# EAGLE board wheel_board_rear (EAGLE 9.5.0)
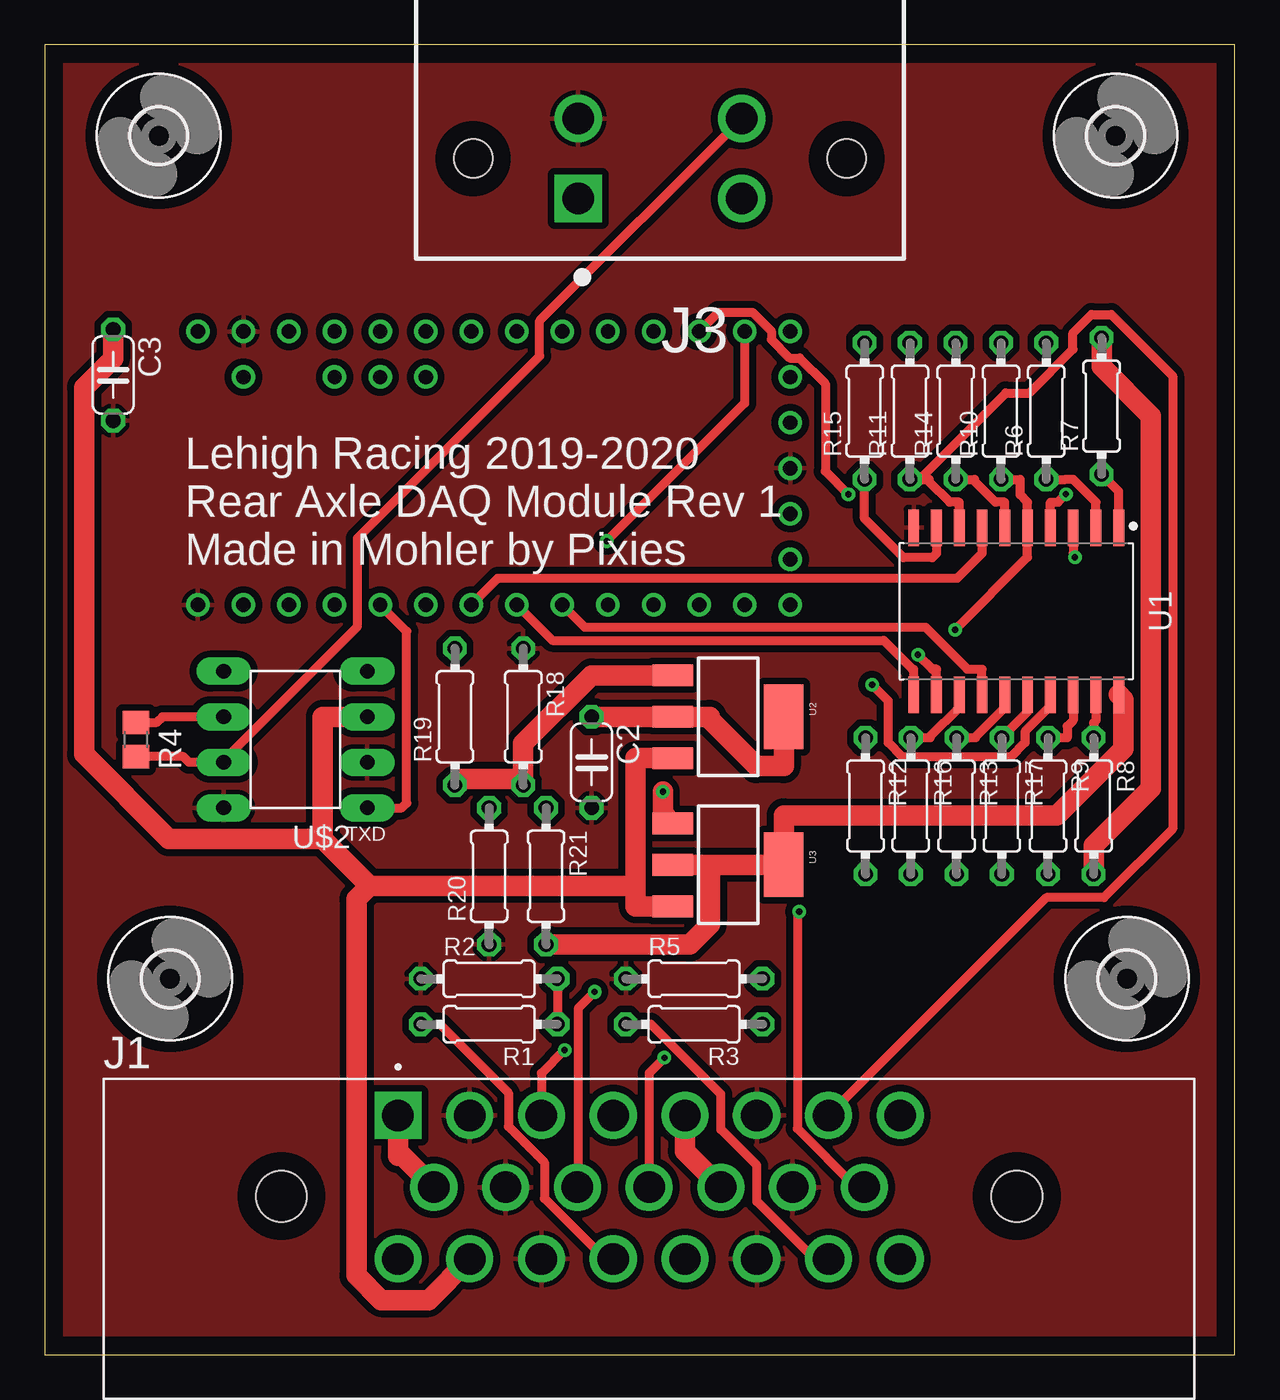
[diagram p0: board, top side]
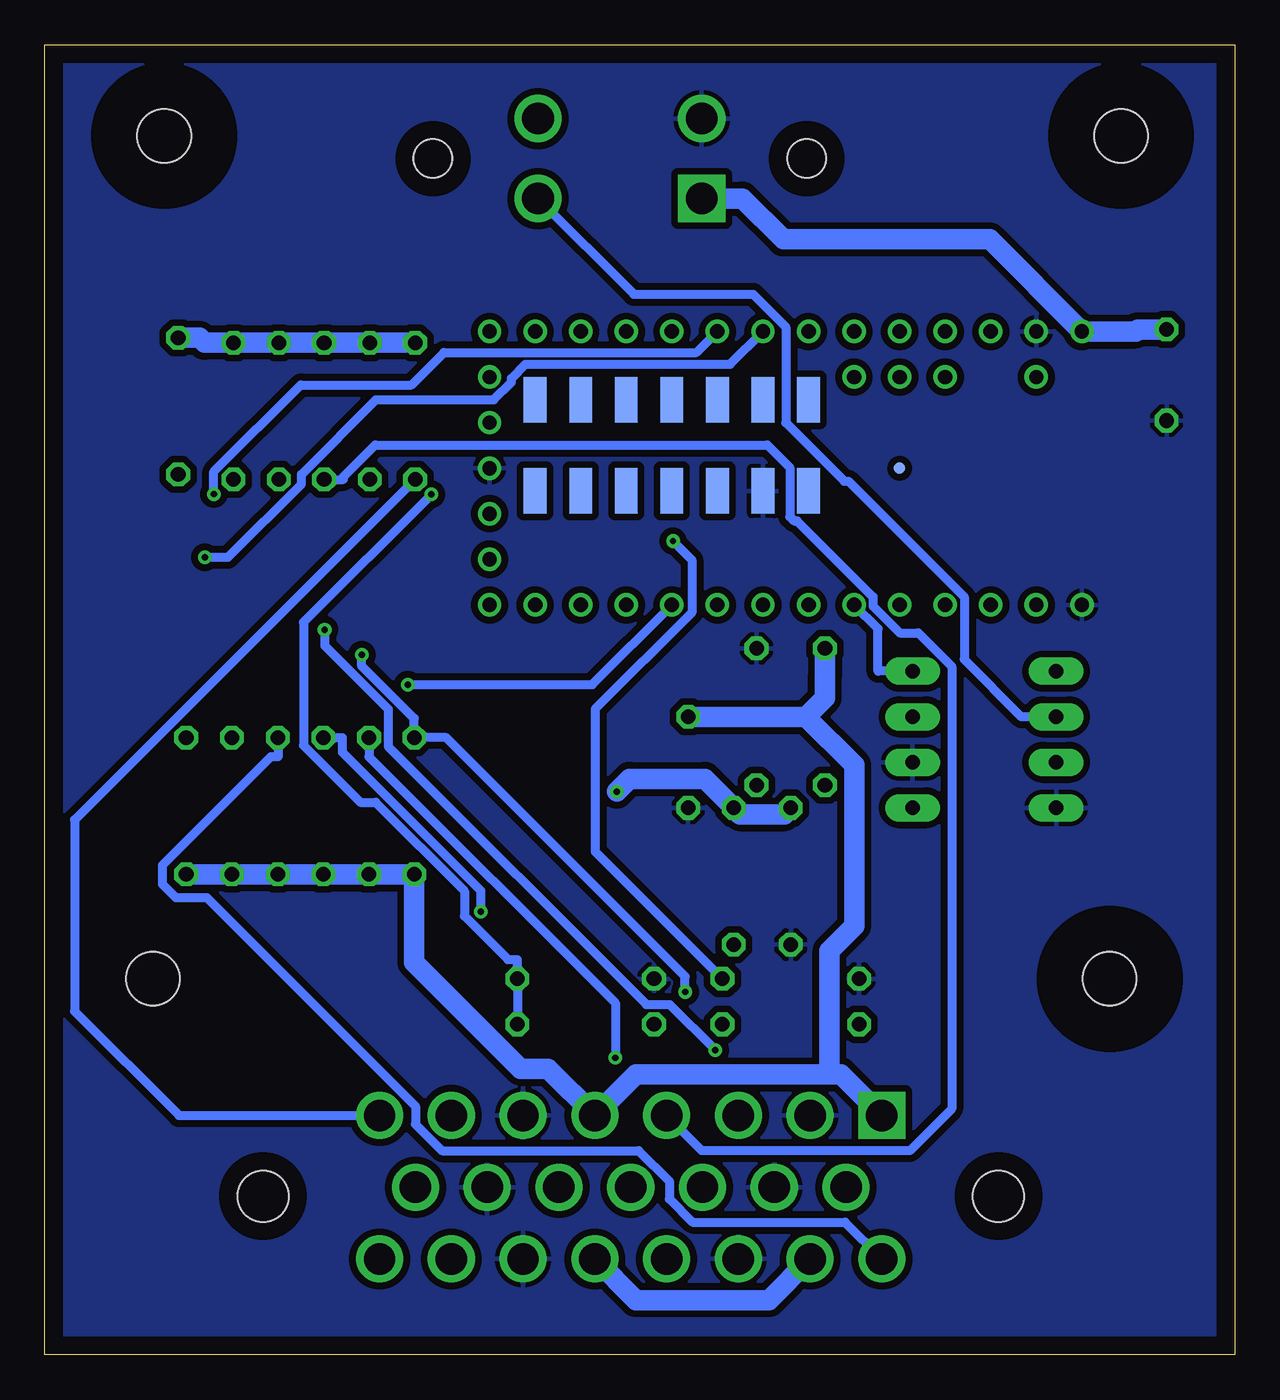
[diagram p1: board, bottom side, seen from below]

Size 66.34 x 73.02 mm. Coordinates in mm from the lower left corner, seen from the top.
Outline: 0,0 66.35,0 66.35,73.01 0,73.01 0,0
Copper layers (1*16): Top 0.035mm / dielectric 1.5mm / Bottom 0.035mm
Design rules "default": minimum track width 6mil, minimum drill 0.35mm, track to track 6mil, track to pad 6mil, pad to pad 6mil, via to via 6mil, smd to smd 6mil, copper to edge 40mil, drill to drill 6mil, minimum pad ring 10mil, minimum via ring 8mil, stop-mask expansion 4mil, vias tented up to drill 0mil, thermal gap 10mil
Net classes: 0 default: width 0.508 mm, drill 0.254 mm; 1 pwr: width 1.143 mm, clearance 0.381 mm

## Footprints (pad centres in the part's own frame; a part is rotated, then mirrored left to right if it is on the bottom)
C050-024X044 = drill 0.813 octagon: 1 -2.54,0; 2 2.54,0
3,0 = hole 3: 0,0
TE_1-776087-1 = drill 1.75 square: 1 0,0 | drill 1.75: 2 4,0; 3 8,0; 4 12,0; 5 16,0; 6 20,0; 7 24,0; 8 28,0; 9 2,-4; 10 6,-4; 11 10,-4; 12 14,-4; 13 18,-4; 14 22,-4; 15 26,-4; 16 0,-8; 17 4,-8; 18 8,-8; 19 12,-8; 20 16,-8; 21 20,-8; 22 24,-8; 23 28,-8 | hole 2.85: -6.5,-4.5; 34.5,-4.5
TE_DTF13-4P = drill 1.76 square: 1 4.561,2.223 | drill 1.76: 2 4.561,-2.227; 3 -4.559,-2.227; 4 -4.559,2.223 | hole 2.16: -10.415,0; 10.415,0
0204/7 = drill 0.813 octagon: 1 -3.81,0; 2 3.81,0
R0805 = smd 1.3 x 1.5: 1 -0.95,0; 2 0.95,0
SOIC127P1032X265-20N = smd 2.052 x 0.602: 1 -4.654,5.715; 2 -4.654,4.445; 3 -4.654,3.175; 4 -4.654,1.905; 5 -4.654,0.635; 6 -4.654,-0.635; 7 -4.654,-1.905; 8 -4.654,-3.175; 9 -4.654,-4.445; 10 -4.654,-5.715; 11 4.654,-5.715; 12 4.654,-4.445; 13 4.654,-3.175; 14 4.654,-1.905; 15 4.654,-0.635; 16 4.654,0.635; 17 4.654,1.905; 18 4.654,3.175; 19 4.654,4.445; 20 4.654,5.715
SOT223 = smd 1.219 x 2.235: 1 -2.311,-3.099; 2 0,-3.099; 3 2.311,-3.099 | smd 3.6 x 2.2: 4 0,3.099
TEENSY3.1_ALL = drill 0.8: 3.3V@1 2.54,5.08; 3.3V@2 -7.62,-22.86; A10 0,0; A11 0,-2.54; A14/DAC 0,-22.86; AGND 2.54,7.62; AREF 0,2.54; D0 -12.7,7.62; D1 -12.7,5.08; D2 -12.7,2.54; D3 -12.7,0; D4 -12.7,-2.54; D5 -12.7,-5.08; D6 -12.7,-7.62; D7 -12.7,-10.16; D8 -12.7,-12.7; D9 -12.7,-15.24; D10 -12.7,-17.78; D11 -12.7,-20.32; D12 -12.7,-22.86; D13/LED 2.54,-22.86; D14/A0 2.54,-20.32; D15/A1 2.54,-17.78; D16/A2 2.54,-15.24; D17/A3 2.54,-12.7; D18/A4 2.54,-10.16; D19/A5 2.54,-7.62; D20/A6 2.54,-5.08; D21/A7 2.54,-2.54; D22/A8 2.54,0; D23/A9 2.54,2.54; GND@1 -12.7,10.16; GND@2 -5.08,-22.86; PROGRAM -2.54,-22.86; VBAT -10.16,-22.86; VIN 2.54,10.16; VUSB 0,7.62 | smd 2.54 x 1.27 bottom: 3.3V@3 -1.27,-7.62; A12 -6.35,-5.08; A13 -1.27,-5.08; D24 -6.35,-10.16; D25 -6.35,-12.7; D26/A15 -6.35,-15.24; D27/A16 -6.35,-17.78; D28/A17 -6.35,-20.32; D29/A18 -1.27,-20.32; D30/A19 -1.27,-17.78; D31/A20 -1.27,-15.24; D32 -1.27,-12.7; D33 -1.27,-10.16; GND@3 -6.35,-7.62 | smd 0.635 x 0.635 bottom: RESET -5.08,0
MCP2561_PDIP = drill 0.813 pad 1.524 long: CANH 4,1.27; CANL 4,-1.27; RXD -4,-3.81; SPLIT 4,-3.81; STBY 4,3.81; TXD -4,3.81; VDD -4,-1.27; VSS -4,1.27

## Placement (x,y rotation side)
C2  10u  [C050-024X044]  30.48,33.02 270 top
C3  [C050-024X044]  3.81,54.61 270 top
H1  MOUNT-HOLE3.0  [3,0]  60.33,20.95 0 top
H2  MOUNT-HOLE3.0  [3,0]  6.99,20.95 0 top
H3  MOUNT-HOLE3.0  [3,0]  59.69,67.94 0 top
H4  MOUNT-HOLE3.0  [3,0]  6.35,67.94 0 top
J1  1-776087-1  [TE_1-776087-1]  19.69,13.33 0 top
J3  DTF13-4P  [TE_DTF13-4P]  34.29,66.67 180 top
R1  100k  [0204/7]  24.77,18.41 180 top
R2  180k  [0204/7]  24.77,20.95 0 top
R3  100k  [0204/7]  36.2,18.41 180 top
R4  120  [R0805]  5.08,34.29 270 top
R5  180k  [0204/7]  36.2,20.95 0 top
R6  4.7k  [0204/7]  55.83,52.6 90 top
R7  4.7k  [0204/7]  58.91,52.88 90 top
R8  4.7k  [0204/7]  58.47,30.59 270 top
R9  4.7k  [0204/7]  55.92,30.59 270 top
R10  4.7k  [0204/7]  53.3,52.6 90 top
R11  4.7k  [0204/7]  48.23,52.6 90 top
R12  4.7k  [0204/7]  45.75,30.59 270 top
R13  4.7k  [0204/7]  50.83,30.59 270 top
R14  4.7k  [0204/7]  50.78,52.6 90 top
R15  4.7k  [0204/7]  45.7,52.6 90 top
R16  4.7k  [0204/7]  48.27,30.59 270 top
R17  4.7k  [0204/7]  53.35,30.59 270 top
R18  12k  [0204/7]  26.67,35.56 270 top
R19  10k  [0204/7]  22.86,35.56 90 top
R20  20k  [0204/7]  24.77,26.67 90 top
R21  12k  [0204/7]  27.94,26.67 270 top
U1  PCA9518PWRSOIC-20  [SOIC127P1032X265-20N]  54.15,41.44 270 top
U2  LM1117  [SOT223]  38.1,35.56 270 top
U3  LM1117  [SOT223]  38.1,27.3 270 top
U$1  TEENSY3.1_ALL  [TEENSY3.1_ALL]  18.69,54.5 90 top
U$2  MCP2561MCP  [MCP2561_PDIP]  13.97,34.29 180 top

## Library data of the parts
C2 C3 = rcl; SPICEPREFIX: C
H1-H4 = holes
J1 = 1-776087-1; AVAILABILITY: Unavailable; COMMENT: 1-776087-1; DESCRIPTION: AMPSEAL Series; 4mm Pitch 23 Way 3 Row Right Angle PCB Header; Solder Term; 8A; EU_ROHS_COMPLIANCE: Compliant; MF: TE Connectivity; MP: 1-776087-1; PACKAGE: None; PRICE: None; TE_PURCHASE_URL: https://www.te.com/usa-en/product-1-776087-1.html?te_bu=Cor&te_type=disp&te_campaign=seda_glo_cor-seda-global-disp-prtnr-fy19-seda-model-bom-cta_sma-317_1&elqCampaignId=32493
J3 = DTF13-4P; AVAILABILITY: In stock; MF: TE Connectivity; MPN: DTF13-4P; PARTREV: NC; STANDARD: Manufacturer recommendation
R1-R3 R5-R21 = rcl; SPICEPREFIX: R
R4 = eagle-ltspice; SPICEMODEL: NONE; SPICEPREFIX: R
U1 = PCA9518PWR
U2 U3 = SparkFun-IC-Power; PROD_ID: VREG-08170
U$1 = Teensy3.1
U$2 = PoJD

## Nets
2.6V [pwr]: C2.1 J1.1 J1.5 J1.9 J1.13 R6.2 R7.2 R8.2 R9.2 R10.2 R11.2 R12.2 R13.2 R14.2 R15.2 R16.2 R17.2 R19.2 U2.2 U2.4
3.3V [pwr]: R21.2 U1.20 U3.2 U3.4
A0: R1.1 R2.2 U$1.D14/A0
A1: R3.1 R5.2 U$1.D15/A1
CAN-RX: U$1.D4 U$2.RXD
CAN-TX: U$1.D3 U$2.TXD
CAN_H: J3.3 R4.2 U$2.CANH
CAN_L: J3.4 R4.1 U$2.CANL
EN1: U1.7 U$1.D5
EN2: U1.11 U$1.D6
EN3: U1.14 U$1.D7
EN4: U1.17 U$1.D8
EXT_SCL1: J1.3 R10.1 U1.5
EXT_SCL2: J1.7 R11.1 U1.8
EXT_SCL3: J1.11 R12.1 U1.12
EXT_SCL4: J1.15 R13.1 U1.15
EXT_SDA1: J1.4 R14.1 U1.6
EXT_SDA2: J1.8 R15.1 U1.9
EXT_SDA3: J1.12 R16.1 U1.13
EXT_SDA4: J1.16 R17.1 U1.16
GND [pwr]: C2.2 C3.2 J1.2 J1.6 J1.10 J1.14 J1.18 J1.21 J3.2 R2.1 R5.1 R18.1 R20.1 U1.10 U$1.AGND U$1.GND@1 U$1.GND@2 U$1.GND@3 U$2.STBY U$2.VSS
N$1: R9.1 U1.18
N$2: R8.1 U1.19
N$3: R7.1 U1.1
N$4: R6.1 U1.2
N$5 [pwr]: R20.2 R21.1 U3.1
N$6: J1.19 R1.2
N$7: J1.22 R3.2
N$14 [pwr]: R18.2 R19.1 U2.1
SCL0: U1.3 U$1.D19/A5
SCL1: U$1.D16/A2
SDA0: U1.4 U$1.D18/A4
SDA1: U$1.D17/A3
VDD_3V3: U$2.SPLIT
VIN [pwr]: C3.1 J1.17 J1.20 J3.1 U2.3 U3.3 U$1.VIN U$2.VDD

## Tracks (layer width: path | path; a pad name or v marks a point on that pad's centre or on a via)
2.6V
  Top 1.143: U2.4 41.2,32.81 39.66,32.81 37.07,35.4 37.07,35.56 U2.2 C2.1 | J1.5 35.69,11.33 J1.13 | J1.1 19.69,11.07 19.95,11.07 J1.9 | R8.2 58.47,28.39 61.65,31.58 61.65,52.33 58.91,55.07 R7.2
  Bottom 1.143: 23.92,35.56 22.86,36.62 22.86,37.76 R19.2 | C2.1 23.92,35.56 | 22.6,15.63 22.6,22.52 21.22,23.9 21.22,32.86 23.92,35.56 | 22.6,15.63 21.98,15.63 J1.1 | 22.6,15.63 33.39,15.63 J1.5 38.29,15.94 39.81,15.94 45.75,21.88 R12.2 46.66,26.78 R16.2 R13.2 R17.2 R9.2 R8.2 | R7.2 57.72,56.69 57.44,56.41 R6.2 R10.2 R14.2 R11.2 R15.2
3.3V
  Top 1.143: U1.20 60.13,36.52 60.13,33.77 56.42,30.06 41.2,30.06 U3.4 37.07,27.3 | 37.07,27.3 37.07,23.97 35.96,22.86 R21.2 | 37.07,27.3 36.69,27.3 U3.2
A0  (via drill 0.35 pad 0.76)
  Top 0.508: U$1.D14/A0 39.01,53.04 v31.32,45.35 | R2.2 R1.1
  Bottom 0.508: v31.32,45.35 30.27,44.3 30.27,41.37 35.66,35.98 35.66,28.04 R2.2
A1  (via drill 0.35 pad 0.76)
  Top 0.508: U$1.D15/A1 37.55,58.11 39.44,58.11 40.49,57.06 40.49,56.59 41.52,55.56 42.07,55.56 43.51,54.12 43.51,49.25 v44.8,47.95
  Bottom 0.508: v44.8,47.95 51.92,40.83 51.92,33.97 48.75,30.79 47.91,30.79 42.96,25.85 42.96,24.45 40.53,22.02 40.01,22.02 R5.2 R3.1
CAN-RX
  Bottom 0.508: U$1.D4 19.9,40.46 19.9,38.1 U$2.RXD
CAN-TX
  Top 0.508: U$2.TXD 19.9,30.48 20.17,30.75 20.17,40.32 U$1.D3
CAN_H
  Top 0.508: 9.67,33.02 9.84,33.02 17.42,40.6 17.42,45.51 27.58,55.67 27.58,57.64 J3.3 | U$2.CANH 9.67,33.02 | 9.67,33.02 8.04,33.02 7.72,33.34 R4.2 | 9.67,33.02
CAN_L
  Top 0.508: R4.1 6.24,35.24 6.56,35.56 U$2.CANL
  Bottom 0.508: U$2.CANL 11.9,35.56 15.09,38.75 15.09,42.24 21.55,48.69 21.78,48.69 25.04,51.95 25.04,57.29 26.87,59.12 33.51,59.12 J3.4
EN1
  Top 0.508: U$1.D5 25.24,43.27 50.85,43.27 52.24,44.66 U1.7
EN2
  Top 0.508: U$1.D6 28.3,39.81 46.76,39.81 48.36,38.22 48.44,38.22 U1.11
EN3
  Top 0.508: U$1.D7 30.09,40.56 49.09,40.56 51.43,38.22 52.24,38.22 U1.14
EN4  (via drill 0.35 pad 0.76)
  Top 0.508: U1.17 56.05,36.15 54.64,34.74 54.64,34.12 53.84,33.32 47.81,33.32 47.01,34.12 47.01,36.45 v46.11,37.35
  Bottom 0.508: v46.11,37.35 35.84,37.35 U$1.D8
EXT_SCL1  (via drill 0.35 pad 0.76)
  Top 0.508: R10.1 54.37,48.79 54.37,47.94 54.78,47.53 U1.5 54.78,44.45 v50.75,40.42 | v28.97,16.98 27.69,15.69 J1.3
  Bottom 0.508: v50.75,40.42 50.75,39.53 47.21,35.99 47.21,33.91 32.82,19.52 31.52,19.52 v28.97,16.98
EXT_SCL2
  Top 0.508: 48.76,48.79 53.57,53.6 54.87,53.6 57.31,56.04 57.31,56.96 58.34,57.99 59.44,57.99 62.88,54.55 62.88,29.31 59.04,25.48 55.83,25.48 J1.7 | 48.76,48.79 49.29,48.79 49.29,48.68 50.44,47.53 50.98,47.53 U1.8 | R11.1 48.76,48.79
EXT_SCL3  (via drill 0.35 pad 0.76)
  Top 0.508: J1.11 29.76,9.41 29.76,19.33 v30.65,20.22 | U1.12 49.7,38.22 49.47,38.22 v48.67,39.01
  Bottom 0.508: v48.67,39.01 48.67,38.39 45.75,35.46 R12.1 43.97,34.4 30.65,21.07 v30.65,20.22
EXT_SCL4  (via drill 0.35 pad 0.76)
  Top 0.508: v42.05,24.69 41.95,24.59 41.95,12.61 45.23,9.33 J1.15 | U1.15 53.52,36.07 51.89,34.45 51.89,34.4 R13.1
  Bottom 0.508: R13.1 49.76,34.4 49.76,33.58 42.05,25.87 v42.05,24.69
EXT_SDA1
  Top 0.508: R14.1 51.85,48.79 51.85,48.68 53,47.53 53.52,47.53 U1.6
  Bottom 0.508: J1.4 29.72,11.37 18.13,11.37 15.78,13.71 15.78,38.36 17.66,40.24 18.69,40.24 20.17,41.72 20.17,42.24 24.41,46.47 24.58,46.47 24.81,46.71 24.81,49.46 26.07,50.71 47.92,50.71 49.71,48.92 49.71,48.79 R14.1
EXT_SDA2
  Top 0.508: U1.9 49.7,44.66 49.48,44.43 47.87,44.43 45.7,46.6 R15.1
  Bottom 0.508: R15.1 64.68,29.81 64.68,19.15 58.87,13.33 J1.8
EXT_SDA3  (via drill 0.35 pad 0.76)
  Top 0.508: R16.1 49.34,34.4 49.34,34.45 50.98,36.08 U1.13 | v34.54,16.55 33.69,15.69 J1.12
  Bottom 0.508: R16.1 48.27,33.33 34.54,19.6 v34.54,16.55 | v34.54,16.55
EXT_SDA4
  Top 0.508: U1.16 54.78,35.83 R17.1
  Bottom 0.508: R17.1 53.35,33.33 53.75,33.33 59.8,27.28 59.8,26.23 59.04,25.48 57.32,25.48 45.69,13.85 45.69,12.85 44.2,11.37 33.24,11.37 31.53,9.66 31.53,8.68 30.24,7.39 21.74,7.39 J1.16
GND
  pour Top: 0,73.03 66.67,73.03 66.67,0 0,0
  pour Bottom: 0,73.03 66.67,73.03 66.67,0 0,0
N$1
  Top 0.508: R9.1 56.99,34.4 56.99,35.02 57.33,35.35 U1.18
N$2
  Top 0.508: U1.19 58.59,35.35 58.47,35.23 R8.1
N$3
  Top 0.508: U1.1 59.86,48.11 R7.1
N$4
  Top 0.508: R6.1 56.89,48.79 57.33,48.79 58.59,47.53 U1.2
N$5  (via drill 0.35 pad 0.76)
  Top 1.143: U3.1 34.46,30.16 v34.46,31.39
  Bottom 1.143: v34.46,31.39 33.75,32.09 29.55,32.09 R21.1 27.59,30.12 25.12,30.12 R20.2
N$6
  Top 0.508: R1.2 22.02,18.41 25.85,14.59 25.85,12.71 27.85,10.71 27.85,8.71 31.23,5.33 J1.19
N$7
  Top 0.508: J1.22 42.9,5.33 39.69,8.55 39.69,10.55 37.69,12.55 37.69,14.51 33.78,18.41 33.45,18.41 R3.2
N$14
  Top 1.143: 26.67,32.1 26.67,34.06 30.48,37.87 U2.1 | R18.2 26.67,32.1 | 26.67,32.1 23.21,32.1 R19.1
SCL0  (via drill 0.35 pad 0.76)
  Top 0.508: U1.3 57.33,44.66 57.42,44.56 v57.42,44.45
  Bottom 0.508: v57.42,44.45 56.13,44.45 52.04,48.54 52.04,49.07 47.88,53.23 41.32,53.23 40.34,54.21 40.34,54.42 39.56,55.21 28.14,55.21 U$1.D19/A5
SDA0  (via drill 0.35 pad 0.76)
  Top 0.508: U1.4 56.05,47.53 56.48,47.53 v56.92,47.97
  Bottom 0.508: v56.92,47.97 56.92,49.22 52.09,54.05 45.91,54.05 44.1,55.87 30.02,55.87 U$1.D18/A4
VIN
  Top 1.143: 32.93,26.13 32.93,33.25 U2.3 | 32.93,26.13 32.93,24.99 U3.3 | 32.93,26.13 18.1,26.13 | 18.1,26.13 17.37,25.4 17.37,4.42 18.76,3.04 21.39,3.04 J1.17 | 15.49,28.74 18.1,26.13 | 15.49,28.74 15.49,35.56 U$2.VDD | 15.49,28.74 6.91,28.74 2.18,33.47 2.18,53.91 3.81,55.54 C3.1
  Bottom 1.143: J1.17 25.98,3.04 33.39,3.04 J1.20 | J3.1 27.46,64.45 25.18,62.18 13.68,62.18 U$1.VIN 5.54,57.04 5.42,57.15 C3.1

## Text on the board
tPlace: Lehigh Racing 2019-2020 / Rear Axle DAQ Module Rev 1 / Made in Mohler by Pixies